# Altium PCB Power_Supply.PcbDoc
Units mm, origin at the board's own origin, x right, y up, seen from the top; angles counter-clockwise.
Board outline 61.85 x 47.24 mm, 2 copper layers (Top Layer, Bottom Layer); 17 components, 8 nets, 36 pads, 4 vias.
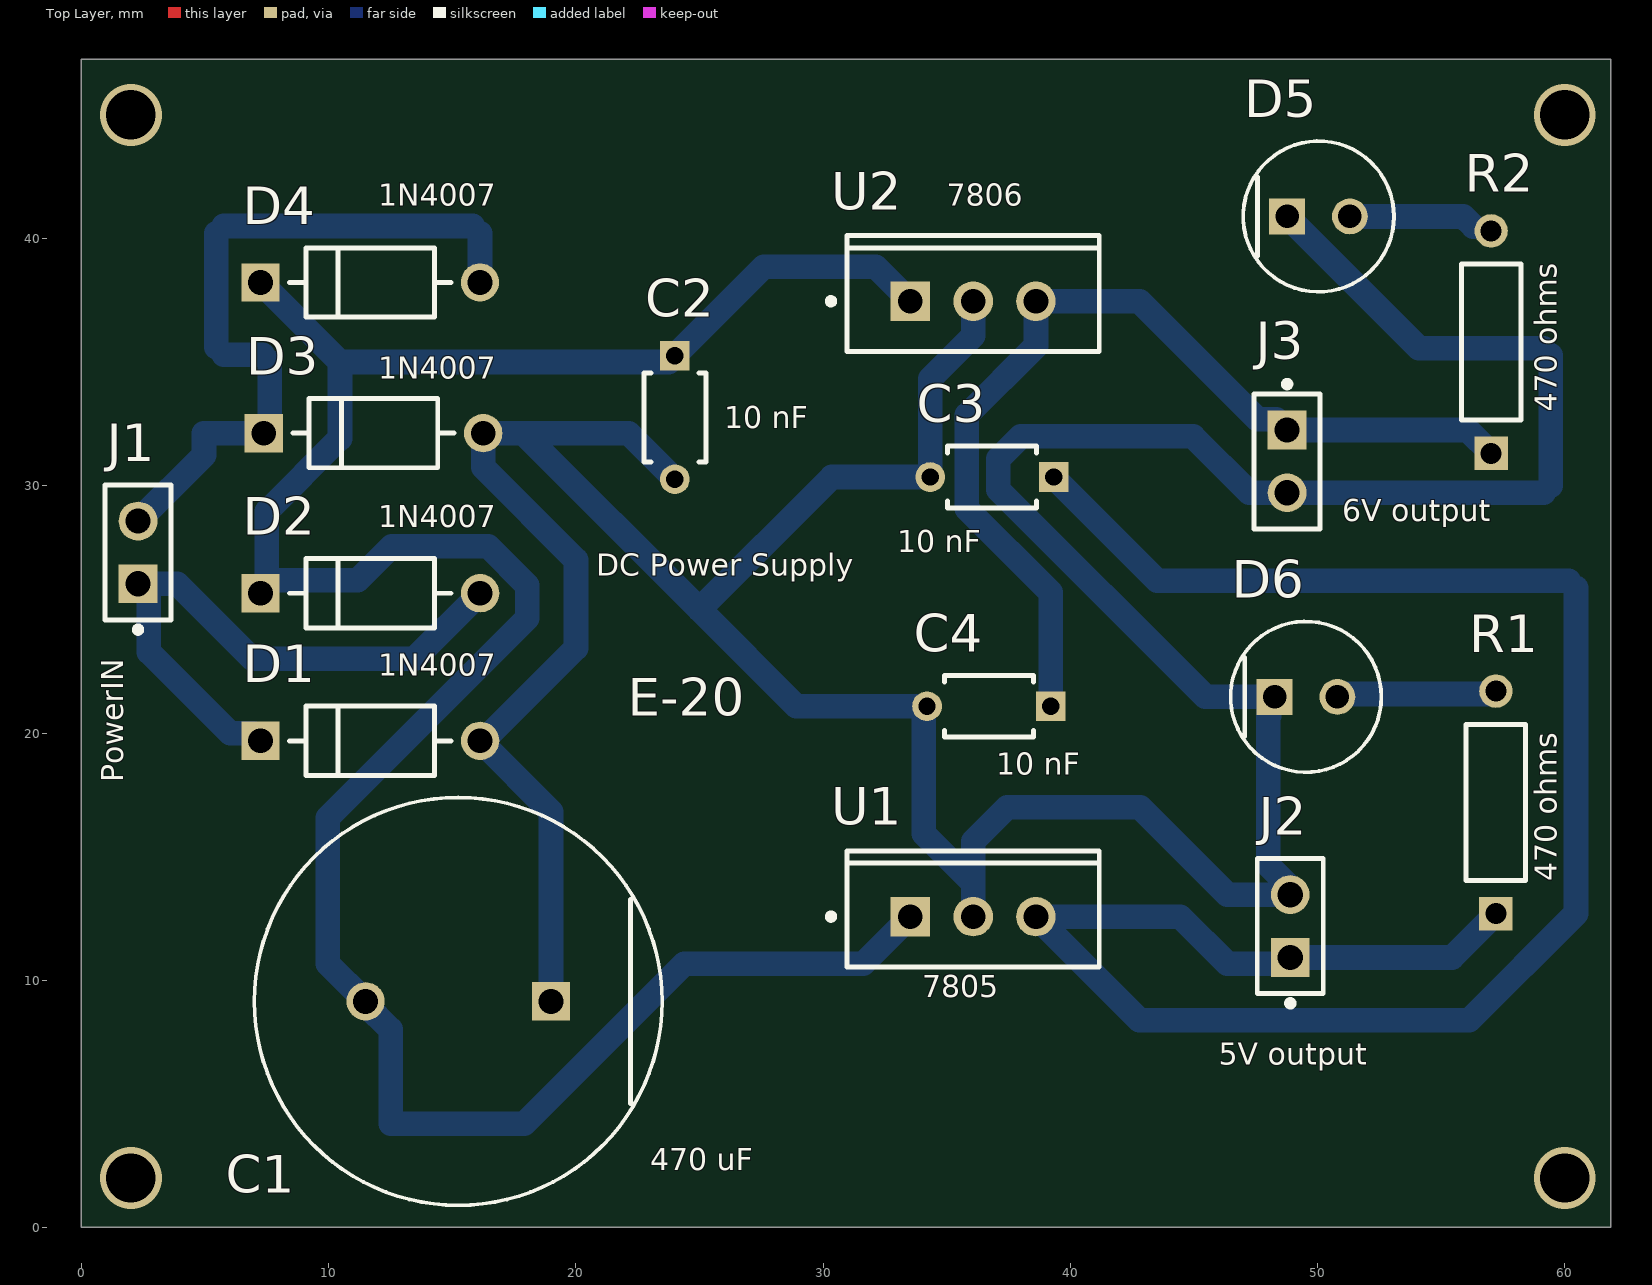
[diagram p0: Top Layer view]
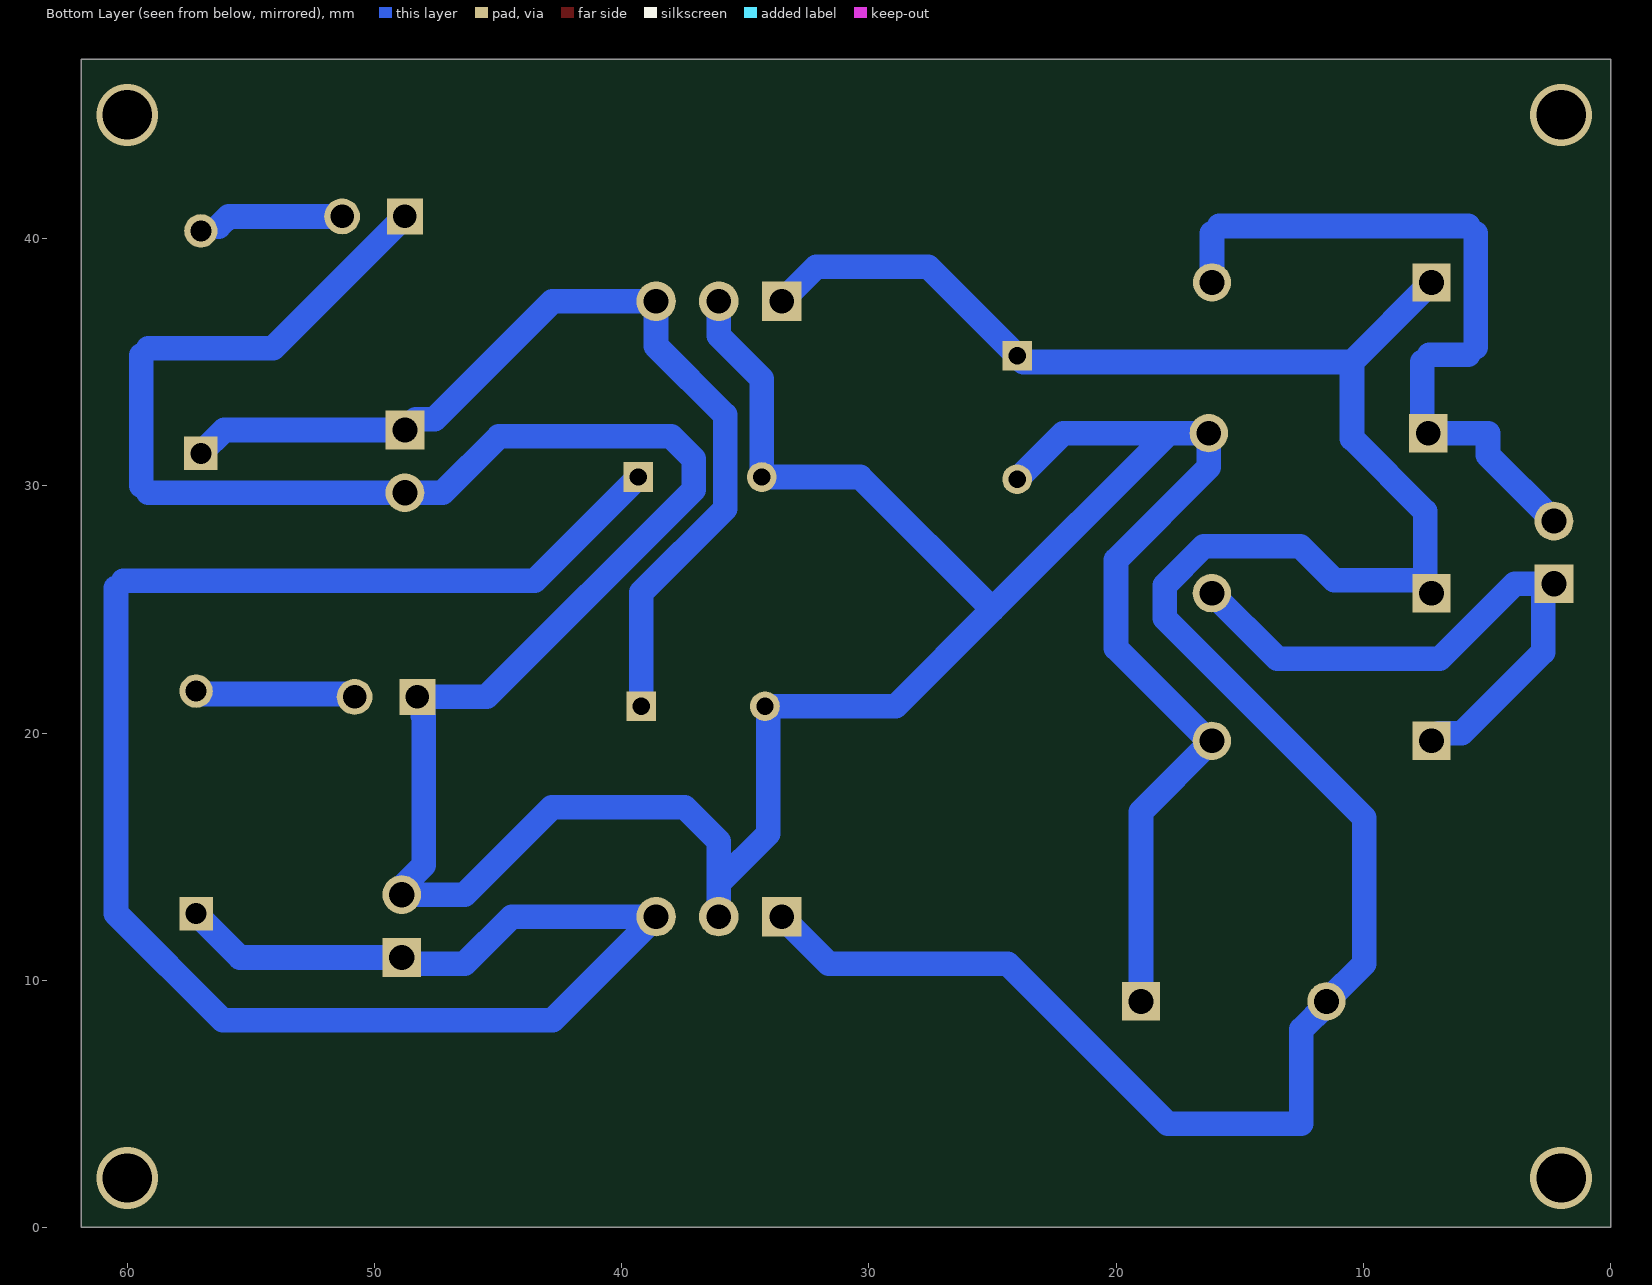
[diagram p1: Bottom Layer view, seen from below]
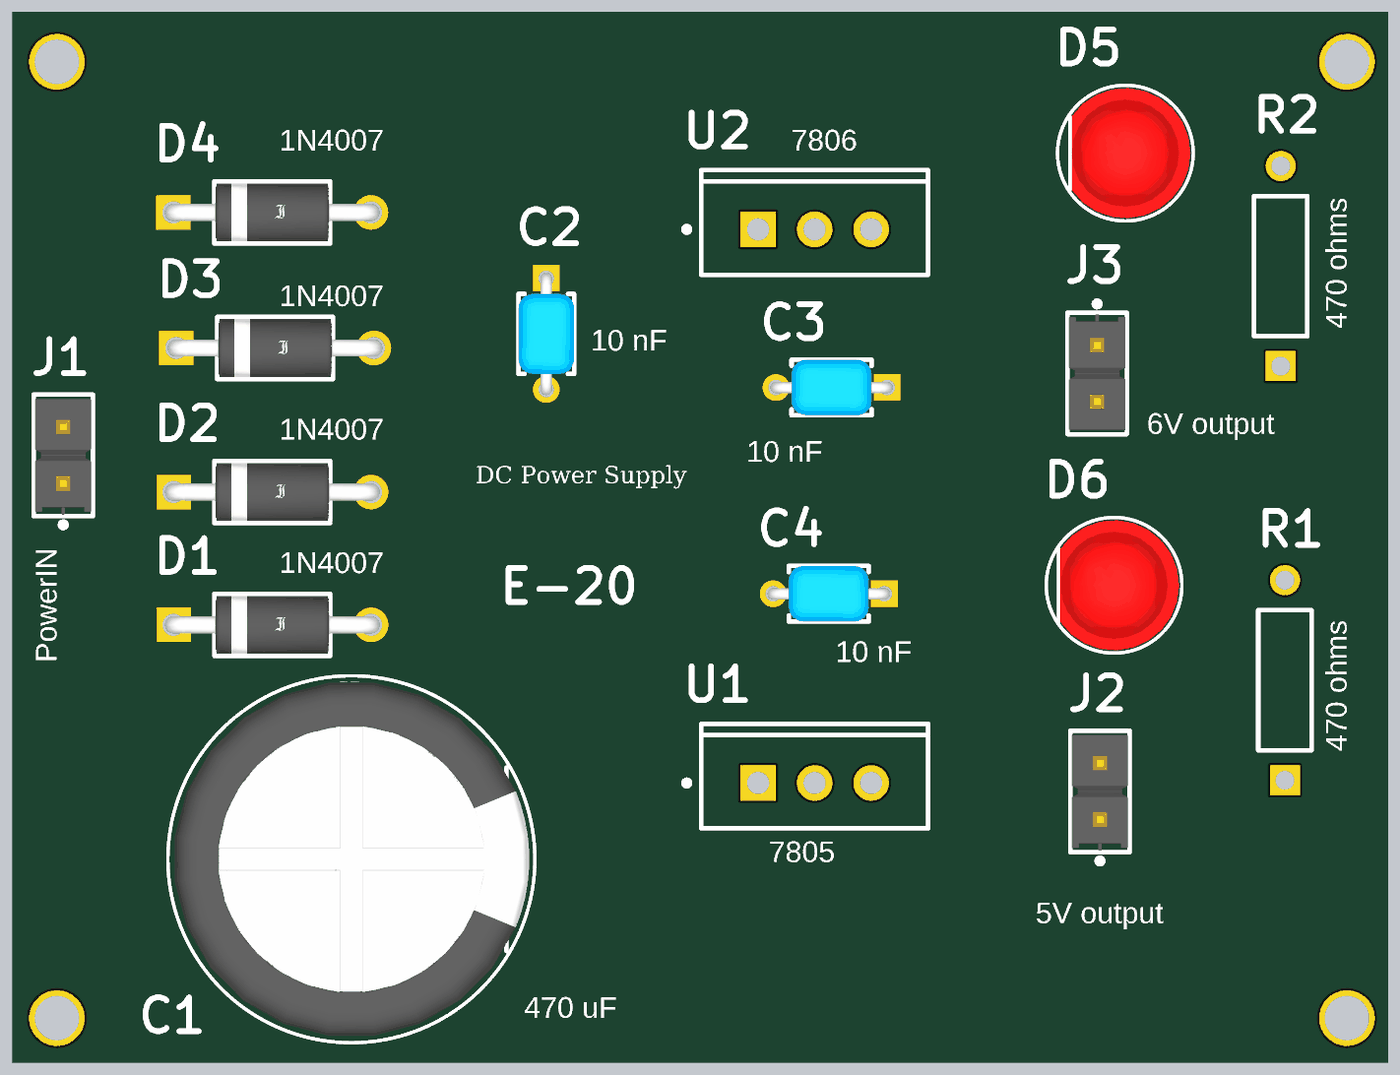
[diagram p2: 3D render of the assembled board from above, using the file's embedded part models]

## Layer stack, top to bottom
Top Solder: solder mask 0.0102, Solder Resist, Dk 3.5
Top Layer: signal copper 0.0356
Dielectric 1: dielectric 0.32, FR-4, Dk 4.8
Bottom Layer: signal copper 0.0356
Bottom Solder: solder mask 0.0102, Solder Resist, Dk 3.5

## Board outline
0,0 61.849,0 61.849,47.244 0,47.244

## Design rules (kind name [scope] priority, off if disabled: settings)
Clearance [All] p1: gap=0.254 ignorepadtopadclearanceinfootprint=FALSE except(0: Arc-Hole Track-Hole SMDPad-Hole THPad-Hole Via-Hole Fill-Hole Poly-Hole Region-Hole Text-Hole)
PolygonConnect [All] p1: connectstyle=Relief reliefconductorwidth=0.254 reliefentries=4 polygonreliefangle="90 Angle" airgapwidth=0.254
RoutingVias [All] p1: holewidth=0.711 width=1.27 viastyle="Through Hole" minholewidth=0.711 minwidth=1.27 maxholewidth=0.711 maxwidth=1.27
SolderMaskExpansion [All] p1: expansion=0.102 istentingtop=FALSE
Width [All] p1: maxlimit=1 minlimit=0.5 preferedwidth=0.254
30 further rules are at their usual default settings.

## Components (designator, comment, footprint, x,y, rotation, side; value= is the part's Value field where it differs from the comment)
C1 "EEUTA1H331S" FP-RAD-TH-D_16_0_5-L_15_1-MFG 15.24,9.144 r180 top
C2 "RCER71H103K0K1H03B" FP-RCE0K1-MFG 24.003,32.766 r270 top
C3 "RCER71H103K0K1H03B" FP-RCE0K1-MFG 36.83,30.353 r180 top
C4 "RCER71H103K0K1H03B" FP-RCE0K1-MFG 36.703,21.082 r180 top
D1 "1N4007" FP-1N4007-MFG 11.684,19.685 r0 top value=15pF
D2 "1N4007" FP-1N4007-MFG 11.684,25.654 r0 top value=15pF
D3 "1N4007" FP-1N4007-MFG 11.811,32.131 r0 top value=15pF
D4 "1N4007" FP-1N4007-MFG 11.679,38.227 r0 top value=15pF
D5 "LED" FP-HLMP-4700-MFG 50.038,40.894 r0 top
D6 "LED" FP-HLMP-4700-MFG 49.53,21.463 r0 top
J1 "TSW-102-07-L-S" FP-TSW-102-07-L-S-MFG 2.286,27.305 r90 top
J2 "TSW-102-07-L-S" FP-TSW-102-07-L-S-MFG 48.895,12.192 r90 top
J3 "TSW-102-07-L-S" FP-TSW-102-07-L-S-MFG 48.768,30.988 r270 top
R1 "MFR-25FBF52-1K" RESA60-630X240 57.211,17.193 r90 top
R2 "MFR-25FBF52-1K" RESA60-630X240 57.023,35.814 r90 top
U1 "LM7805ACT" FAIR-TO-220-3 36.068,12.573 r90 top
U2 "LM7806ACT" FAIR-TO-220-3 36.068,37.465 r90 top

## Footprints (in the part's own frame and the unit in brackets; to place one, negate y for a bottom-side part, rotate by r counter-clockwise, add the part's x,y. Pads: shape width x height; smd on the part's side, far side on the other; paste and mask are expansions set on the pad)
FAIR-TO-220-3 [mm] "FM, 3-Leads, Body 10.2x4.7mm, Pitch 2.54mm"
  rect 1.6x1.6 hole 1: 1(0,2.54)
  round 1.6 hole 1: 2(0,0) 3(0,-2.54)
  silkscreen extent -2.04,-5.1 2.66,5.87, body extent -2.04,-5.1 2.66,5.1, height 18.95
FP-1N4007-MFG [mm]
  rect 1.55x1.55 hole 1 paste-1000 mask+0: 1(-4.44,0)
  round 1.55 hole 1 paste-1000 mask+0: 2(4.44,0)
  silkscreen extent -3.26,-1.4 3.26,1.4, body extent -5.32,-1.5 5.32,1.5, height 0.25
FP-HLMP-4700-MFG [mm]
  rect 1.45x1.45 hole 0.95 paste-1000 mask+0: 1(-1.27,0)
  round 1.45 hole 0.95 paste-1000 mask+0: 2(1.27,0)
  silkscreen extent -3.05,-3.05 3.05,3.05, body extent -3.15,-3.15 3.15,3.15, height 0.25
FP-RAD-TH-D_16_0_5-L_15_1-MFG [mm]
  rect 1.55x1.55 hole 1 paste-1000 mask+0: 1(-3.75,0)
  round 1.55 hole 1 paste-1000 mask+0: 2(3.75,0)
  silkscreen extent -8.25,-8.25 8.25,8.25, body extent -8.35,-8.35 8.35,8.35, height 0.25
FP-RCE0K1-MFG [mm]
  rect 1.2x1.2 hole 0.7 paste-1000 mask+0: 1(-2.5,0)
  round 1.2 hole 0.7 paste-1000 mask+0: 2(2.5,0)
  silkscreen extent -1.8,-1.25 1.8,1.25, body extent -3.2,-1.35 3.2,1.35, height 0.25
FP-TSW-102-07-L-S-MFG [mm]
  rect 1.57x1.57 hole 1.02 paste-1000 mask+0: 1(-1.27,0)
  round 1.57 hole 1.02 paste-1000 mask+0: 2(1.27,0)
  silkscreen extent -3.25,-1.34 2.73,1.34, body extent -2.83,-1.44 2.83,1.44, height 0.25
RESA60-630X240 [mm] "Axial Resistor, 2-Leads, Dia 2.4mm, Body Length 6.3mm"
  rect 1.35x1.35 hole 0.85: 1(-4.5,0)
  round 1.35 hole 0.85: 2(4.5,0)
  silkscreen extent -3.15,-1.2 3.15,1.2, body extent -3.15,-1.2 3.15,1.2, height 2.4

## Part data
C1: library part CMP-05427-000770-1, "Aluminum Electrolytic Capacitors (Radial Lead Type) AEC-Q200 Qualified 330uF ±20% 50V", Capacitance=470uF, Case/Package=Radial, Max Operating Temperature=125°C, Min Operating Temperature=-40°C, Package Quantity=100, Ripple Current=1.45A, Tolerance=20%, Voltage Rating=50V, Diameter=16mm, Height=15mm, Lead Diameter=0.8mm, Lead Pitch=7.5mm, Length=15mm, Life (Hours)=2000Hour, Mount="Through Hole", Number of Pins=2, Packaging=Bulk, Radiation Hardening=No, REACH SVHC="No SVHC", RoHS Compliant=Yes, Series=TA, Termination=Radial, Voltage Rating (DC)=50V
C2 C3 C4: library part CMP-06035-044411-1, "Cap Ceramic 10nF 50V X7R ±10% Radial 5mm +125°C Automotive Bulk", Capacitance=10nF, Case/Package=Radial, Dielectric=X7R, Max Operating Temperature=125°C, Min Operating Temperature=-55°C, Package Quantity=500, Ratings=AEC-Q200, Resistor Type=Ceramic, Tolerance=10%, Voltage Rating=50V, Height=3.5mm, Height - Seated (Max)=0.138inch, Lead Diameter=0.5mm, Lead Free="Lead Free", Lead Pitch=0.197inch, Lead/Base Style="Formed Leads", Length=0.142inch, Mount="Through Hole", Packaging=Bulk, Termination=Radial, Voltage Rating (DC)=50V, Width=0.098inch
D1 D2 D3 D4: library part CMP-123542-000001-1, "Rectifier diode 1000 V 1 A DO-41, ,", Capacitance=15pF, Forward Current=1A, Manufacturer=Diotec, Max Junction Temp=+175°C, Max Repetitive Reverse Voltage=1000V, Max Surge Forward Current=27A, Peak Reverse Current=5uA, Temperature="-50°C to +175°C", Temperature Range Low=-50°C, Automotive=No, Category=Diode, ComponentLink2Description=Datasheet, ComponentLink2URL=https://datasheet.octopart.com/1N4007-Diotec-datasheet-62346875.pdf, Device Class L1="Discrete Semiconductors", Device Class L2=Diodes, Device Class L3="Rectifier Diodes", Height=2.8mm, Ipc Land Pattern Name=DIOAD888W100L520D280, Lead Free=Yes, Manufacturer Part Number=1N4007, Octopart=https://octopart.com/1n4007-diotec-4040411, Package=1N4007, Reverse Voltage=1000V, RoHS=TRUE, Temperature Range High=+175°C
D5 D6: library part CMP-18399-000008-1, "LED RED DIFFUSED T-1 3/4 T/H", Colour=Red, Forward Current=2mA, Forward Voltage=1.7V, Manufacturer=Broadcom, Manufacturer Part Number=HLMP-4700, Power Dissipation=14mW, Reverse Voltage=5V, Temperature="-40°C to +100°C", Temperature Range High=+100°C, Temperature Range Low=-40°C, Automotive=No, Category=Diode, ComponentLink2Description=Datasheet, ComponentLink2URL=https://docs.broadcom.com/docs/AV02-1557EN, Device Class L1=Optoelectronics, Device Class L2=LEDs, Device Class L3=unset, Digikey Description="LED RED DIFFUSED T-1 3/4 T/H", Lead Free=Yes, Led Orientation=Straight, Luminous Intensity=2.3mcd, Mouser Description="LED; Red; 2.3mcd; 0.24In.Dia.; T-1-3/4; 500mA; 1.7V; 635nm; 50deg; 5V; 24mW; -55degC;", Octopart=https://octopart.com/hlmp-4700-broadcom-71130526, Package=HLMP-4700, Peak Emmision Wavelength=635nm, RoHS=TRUE, Viewing Angle=50°, Wavelength=626nm
J1 J2 J3: library part CMP-02766-001428-1, "CONN HEADER VERT 2POS 2.54MM", Color=Black, Current Rating=7.6A, Max Operating Temperature=125°C, Max Voltage Rating (AC)=550V, Min Operating Temperature=-55°C, Package Quantity=1, Connector Type="Male Pin", Contact Material=Bronze, Contact Mating Length=0.23inch, Contact Plating=Gold, Contact Type="Male Pin", Depth=2.54mm, Gender=Male, Housing Color=Black, Housing Material=Polyester, Lead Free="Lead Free", Length=5.08mm, Max Current Rating=7.6A, Mount="Through Hole", Number of Contacts=2, Number of Positions=2, Number of Rows=1, Orientation=Straight, Packaging=Bulk, Pitch=2.54mm, Radiation Hardening=No, REACH SVHC="No SVHC", RoHS Compliant=Yes, Series=TSW, Termination=Solder, Voltage Rating=550V, Width=2.54mm
R1 R2: library part CMP-1659-00075-1, "Axial Resistor, 1 KOhm, +/- 1%, 250 mW, -55 to 155 degC, 2-Pin THD, RoHS, Bulk", Case\Package=Axial, Max Operating Temperature="155 degC", Min Operating Temperature="-55 degC", Package Quantity=200, Power Rating="250 mW", Resistance="470 ohm", Tolerance=1%, Voltage Rating="250 V", ComponentLink1Description="Manufacturer URL", ComponentLink1URL=http://www.yageo.com/, ComponentLink2Description=Datasheet, ComponentLink2URL=http://www.yageo.com/documents/recent/Yageo%20LR_MFR_2013.pdf, DatasheetVersion=Apr-13, Length="0.248 inch", PackageDescription="2-Pin Axial Lead, Dia 2.4 mm, Body Length 6.3 mm", PackageReference=MFR-25, Packaging=Bulk, RoHSCompliant=true
U1 U2: library part CMP-2000-04937-1, "Positive Voltage Regulator, 5 V, 1 A, 0 to 125 degC, 3-Pin TO-220, RoHS, Tube", Dropout Voltage Measurement Current=1A, Manufacturer=Fairchild, Maximum Input Voltage=35V, Maximum Operating Temperature=+125degC, Minimum Operating Temperature=0degC, Output Voltage=5V, Package Description="3-Pin Through Hole Device, Body 10 x 4.5 mm, Pitch 2.54 mm", Package Reference=TO-220, Quiescent Current=6mA, Typical Dropout Voltage @ Current=2V@1A, Datasheet URL=https://datasheet.ciiva.com/5816/1359194-5816420.pdf, Datasheet Version="Rev. 1.0.1, 05/2006", Dimensions=10.67x4.83x16.51mm, Height=16.51mm, Length=10.67mm, Line Regulation=50mV, Load Regulation=100mV, Manufacturer URL=https://www.fairchildsemi.com/, Maximum Output Current=1A, Mounting Type=ThroughHole, Number of Outputs=1, Output Type=Fixed, Package Type=TO-220, Package URL=https://www.fairchildsemi.com/package-drawings/TO/TO220B03.pdf, Pin Count=3, Polarity=Positive, Regulator Function=Linear, Series=LM78xx, Width=4.83mm

## Via types
v1: diameter 2.5, hole 2, Top Layer to Bottom Layer, 4 vias

## Nets (pads, with @x,y where several pads share a name; then routed paths per layer and width w, separated by ;. In a path a pad name is that pad's centre, name@x,y a point inside that pad or via, vN(x,y) a via of type N, cw(c..) or ccw(c..) an arc to the next point about the centre after c; other vN are vias at no path point)
GND: C1.1 C2.2 C3.2 C4.2 D1.2 D3.2 D5.1 D6.1 J2.2 J3.2 U1.2 U2.2 | length 168.6
  Bottom Layer w0.5: D1.2 D1.2@16.256,19.685 ; D3.2 D3.2@16.869,32.131 ; C4.2@34.069,20.948 C4.2 ; J2.2 J2.2@48.895,13.752 ; 59.143,29.718 59.436,30.011 ; 59.143,35.56 59.436,35.267
  Bottom Layer w1: D1.2 18.99,16.819 C1.1 ; D3.2 16.251,30.749 20,27 20,23.429 D1.2@16.256,19.685 ; D3.2@16.869,32.131 17.869,32.131 ; C2.2 22.138,32.131 17.869,32.131 ; C4.2@34.069,20.948 34.069,15.931 36.068,13.932 ; C4.2 28.918,21.082 25,25 ; U1.2 36.068,13.932 ; U2.2 36.068,36.068 34.33,34.33 C3.2 30.353,30.353 25,25 ; D5.1 54.102,35.56 59.143,35.56 ; J2.2 46.355,13.462 42.817,17 37.447,17 36.068,15.621 36.068,13.932 ; J2.2@48.895,13.752 48,14.647 48,20.652 48.035,20.687 48.035,21.238 D6.1 45.466,21.463 37.084,29.845 37.084,31.084 38.004,32.004 44.958,32.004 47.244,29.718 J3.2 59.143,29.718 ; 59.436,30.011 59.436,35.267 ; 17.869,32.131 25,25
NetC3_1: C3.1 J2.1 R1.1 U1.3 | length 81.7
  Bottom Layer w0.5: J2.1@48.641,10.668 J2.1 ; 60.159,26.162 60.452,25.869
  Bottom Layer w1: C3.1 43.521,26.162 60.159,26.162 ; J2.1@48.641,10.668 46.355,10.668 44.45,12.573 U1.3 42.799,8.382 56.134,8.382 60.452,12.7 60.452,25.869 ; J2.1 55.441,10.922 R1.1
NetC4_1: C4.1 J3.1 R2.1 U2.3 | length 39.9
  Bottom Layer w0.5: J3.1@48.334,32.692 J3.1
  Bottom Layer w1: C4.1 39.203,25.681 35.814,29.07 35.814,32.86 38.608,35.654 U2.3 42.799,37.465 47.572,32.692 J3.1@48.334,32.692 ; J3.1 56.079,32.258 R2.1
NetD1_1: D1.1 D2.2 J1.1 | length 25.1
  Bottom Layer w0.5: J1.1 J1.1@2.72,25.601 ; D1.1@6.941,19.988 D1.1
  Bottom Layer w1: J1.1 3.869,26.035 6.904,23 13.47,23 D2.2 ; J1.1@2.72,25.601 2.72,23.28 6.012,19.988 D1.1@6.941,19.988
NetD3_1: D3.1 D4.2 J1.2 | length 30
  Bottom Layer w0.5: 5.456,35.599 5.749,35.306 ; 5.456,40.22 5.749,40.513 ; 7.327,35.306 7.62,35.013 ; D3.1 D3.1@7.62,32.38 ; 15.831,40.513 16.124,40.22 ; D4.2 D4.2@16.124,38.232
  Bottom Layer w1: J1.2 4.953,31.242 4.953,32.131 D3.1 ; 5.456,35.599 5.456,40.22 ; 5.749,35.306 7.327,35.306 ; 5.749,40.513 15.831,40.513 ; D3.1@7.62,32.38 7.62,35.013 ; D4.2@16.124,38.232 16.124,40.22
NetD5_2: D5.2 R2.2 | length 6
  Bottom Layer w0.5: 56.311,40.477 56.86,40.477 R2.2
  Bottom Layer w1: D5.2 55.894,40.894 56.311,40.477
NetD6_2: D6.2 R1.2 | length 6.8
  Bottom Layer w0.5: D6.2@50.899,21.364 D6.2 D6.2@50.915,21.578 ; R1.2@57.096,21.578 R1.2 R1.2@57.112,21.792
  Bottom Layer w1: D6.2@50.915,21.578 R1.2@57.096,21.578
"next input": C1.2 C2.1 D2.1 D4.1 U1.1 U2.1 | length 103
  Bottom Layer w0.5: D2.1 7.493,25.903 D2.1@7.769,26.179 ; C1.2@11.49,9.019 C1.2 ; C2.1@23.749,35.012 C2.1
  Bottom Layer w1: D4.1 10.454,35.012 ; D2.1@7.493,25.903 7.493,28.956 10.454,31.917 10.454,35.012 ; D2.1@7.769,26.179 11.179,26.179 12.552,27.552 16.448,27.552 18.034,25.966 18.034,24.638 9.966,16.57 9.966,10.668 C1.2 ; C1.2@11.49,9.019 12.506,8.003 12.506,4.191 17.907,4.191 24.384,10.668 31.623,10.668 U1.1 ; C2.1@23.749,35.012 10.454,35.012 ; C2.1 27.599,38.862 32.131,38.862 U2.1
copper on no net:
  other v1: 2,2 60,2 2,45 60,45

## Silkscreen, mask and mechanical layers (free items; w line width, h text height)
Top Overlay:
  text "1N4007" at 12,41.017 h1.52
  text "7806" at 35,41.017 h1.52
  text "1N4007" at 12,34.017 h1.52
  text "470 ohms" at 59.983,33 h1.52 r90
  text "10 nF" at 26,32.017 h1.52
  text "6V output" at 51,28.271 h1.52
  text "1N4007" at 12,28.017 h1.52
  text "10 nF" at 33,27.017 h1.52
  text "DC Power Supply" at 20.828,26.049 h1.52
  text "1N4007" at 12,22.017 h1.52
  text "E-20" at 22.099,20.701 h1.52
  text "PowerIN" at 1.984,18 h1.52 r90
  text "10 nF" at 37,18.017 h1.52
  text "470 ohms" at 59.983,14 h1.52 r90
  text "7805" at 34,9.017 h1.52
  text "5V output" at 46,6.271 h1.52
  text "470 uF" at 23,2.017 h1.52